# Altium PCB STAmeba.PcbDoc (part 2 of 3)
Units mm, origin at the board's own origin, x right, y up, seen from the top; angles counter-clockwise.
Board outline 121.75 x 98.31 mm, 2 copper layers (Top Layer, Bottom Layer); 122 components, 112 nets, 521 pads, 187 vias.
Unrouted connection lines stored in the file: 4.
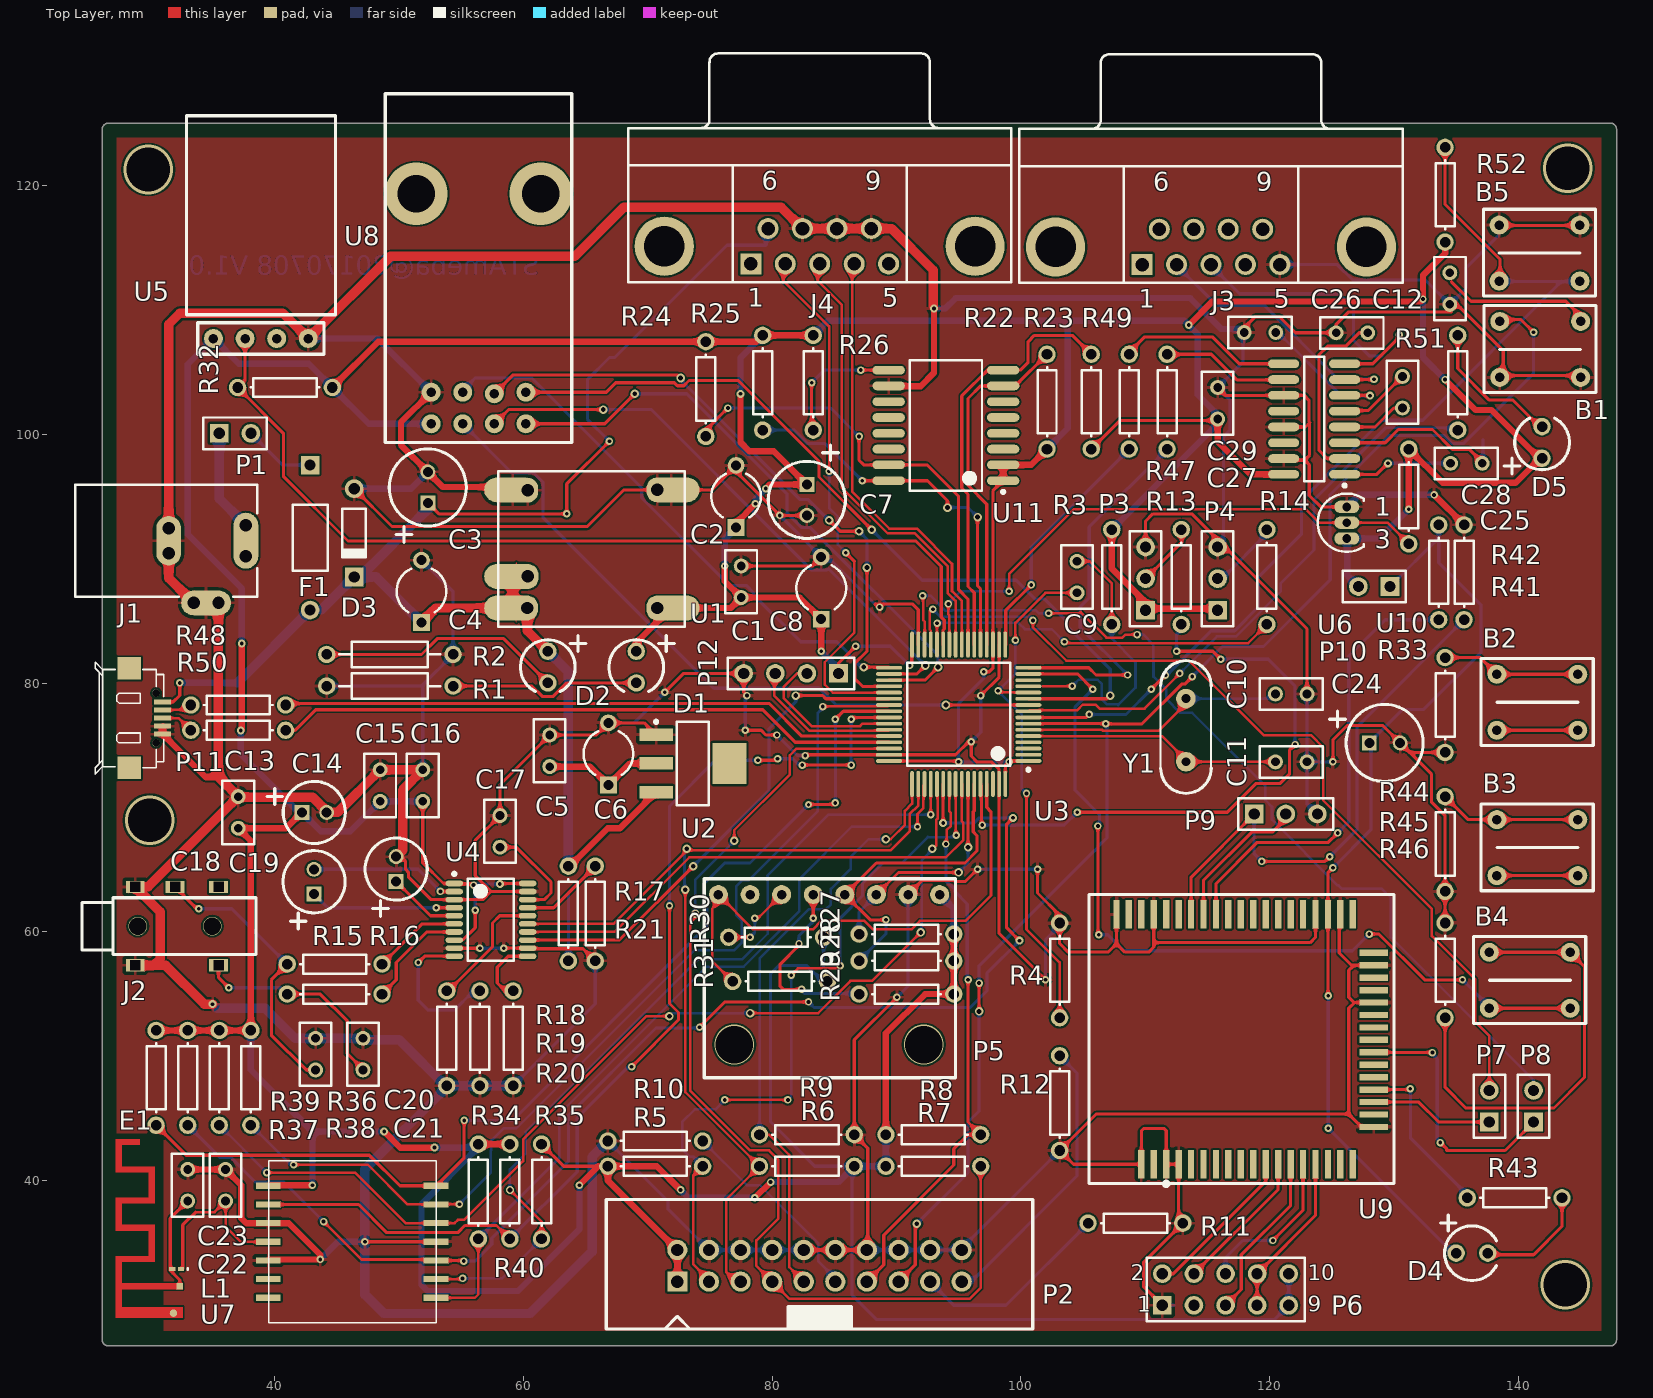
[diagram p0: Top Layer view]

## Via types
v1: diameter 0.6, hole 0.3, Top Layer to Bottom Layer, 130 vias
v2: diameter 0.686, hole 0.381, Top Layer to Bottom Layer, 29 vias
v3: diameter 0.635, hole 0.305, Top Layer to Bottom Layer, 16 vias
v4: diameter 4, hole 3.5, Top Layer to Bottom Layer, 4 vias
v5: diameter 5, hole 3, Top Layer to Bottom Layer, 2 vias
v6: diameter 1.5, hole 1.4, Top Layer to Bottom Layer, 2 vias
v7: diameter 3.2, hole 3, Top Layer to Bottom Layer, 2 vias
v8: diameter 0.584, hole 0.279, Top Layer to Bottom Layer, 1 vias
v9: diameter 0.635, hole 0.381, Top Layer to Bottom Layer, 1 vias

## Nets (pads, with @x,y where several pads share a name; then routed paths per layer and width w, separated by ;. In a path a pad name is that pad's centre, name@x,y a point inside that pad or via, vN(x,y) a via of type N, cw(c..) or ccw(c..) an arc to the next point about the centre after c; other vN are vias at no path point) (continued)
BUTTON1: (continued)
  Top Layer w0.254: U3.15@100.608,80.732 104.561,80.732 v1(105.791,79.502) ; v1(106.197,68.504) 106.197,59.944 106.375,59.766 v1(106.274,59.766) ; v1(128.016,59.817) 128.792,59.817 132.475,56.134 v1(135.509,56.134) ; B4.3@137.668,53.848 B4.4@144.168,53.848
  Bottom Layer w0.254: v1(105.791,79.502) 104.369,78.08 104.369,71.374 106.324,69.418 106.324,68.631 v1(106.197,68.504) v1@106.197,68.393 ; v1(106.274,59.766) 106.985,59.766 108.28,58.471 126.67,58.471 v1(128.016,59.817) ; v1(135.509,56.134) 137.668,53.975 B4.3@137.668,53.848
CC1101_CS: U3.33 U8.4 | length 45.1
  Top Layer w0.254: v2(87.376,81.28) 89.391,81.28 U3.33@89.408,81.263
  Bottom Layer w0.254: U8.4@55.133,103.378 55.133,103.52 56.134,104.521 60.687,104.521 69.531,95.677 69.531,94.87 76.551,87.849 77.928,87.849 78.502,87.274 78.502,87.106 82.296,83.312 85.217,83.312 86.106,82.423 86.106,82.34 87.166,81.28 v2(87.376,81.28)
CHIP_EN: B3.3 B3.4 | length 6.5
  Top Layer w0.254: B3.3@138.28,64.516 B3.4@144.78,64.516
DHT11_IO: R32.2 U3.27 U5.2 | length 75.2
  Top Layer w0.254: U5.2@37.634,107.696 37.634,104.362 R32.2@37.031,103.759 40.714,100.076 40.714,96.611 45.911,91.415 91.556,91.415 93.604,89.367 93.604,85.295 93.848,85.051 93.848,84.346 93.733,84.23 93.733,83.107 U3.27@93.758,83.082